# EAGLE board WiiMouseSchematicRev2 (EAGLE 5.07)
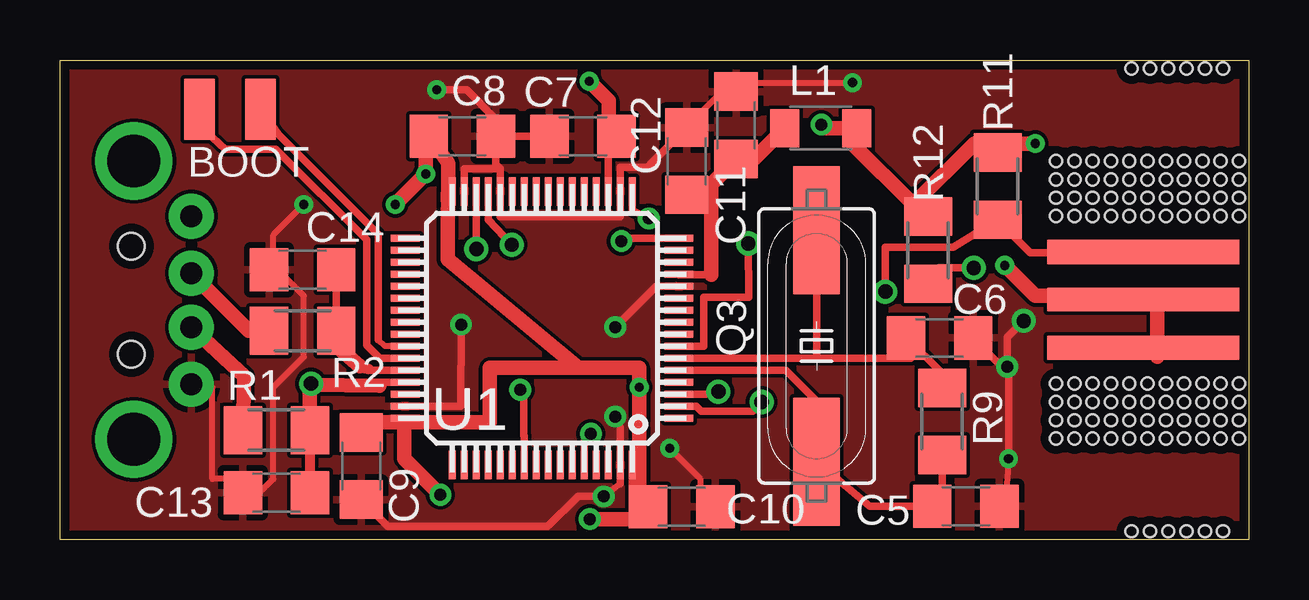
[diagram p0: board, top side]
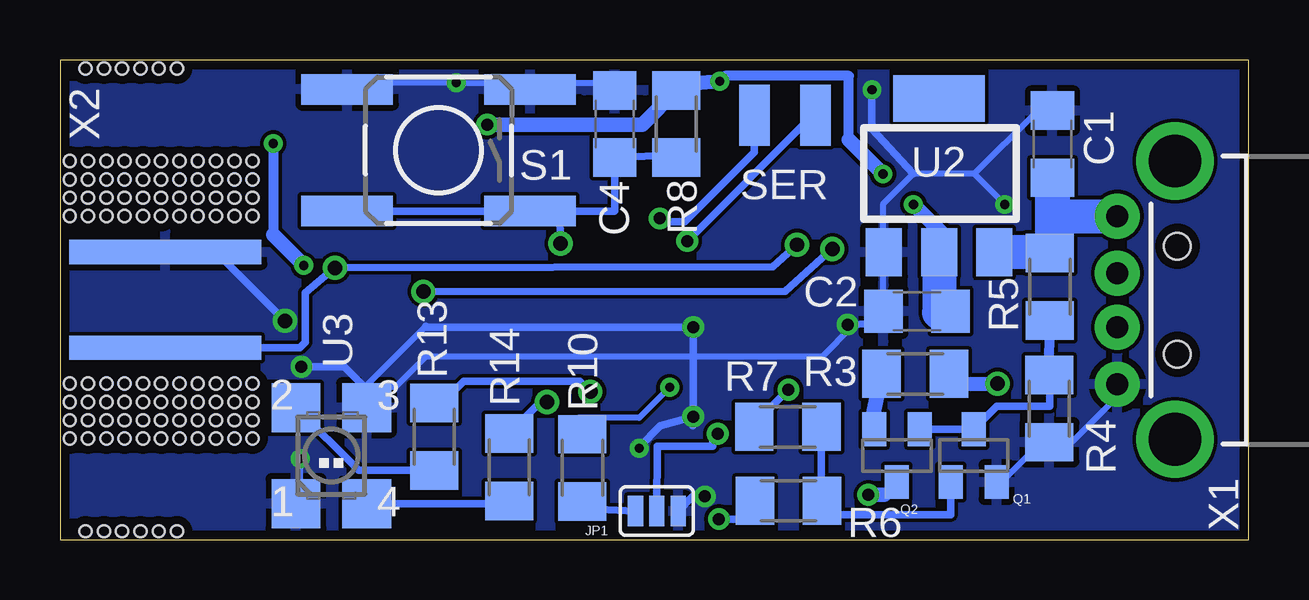
[diagram p1: board, bottom side, seen from below]

Size 49.53 x 19.99 mm. Coordinates in mm from the lower left corner, seen from the top.
Outline: 49.53,0 0,0 0,19.99 49.53,19.99 49.53,0
Copper layers (1*16): Top 0.0356mm / dielectric 1.5011mm / Bottom 0.0356mm
Design rules "typical_4pcb": minimum track width 10mil, minimum drill 15mil, track to track 6mil, track to pad 6mil, pad to pad 6mil, via to via 6mil, smd to smd 6mil, copper to edge 15mil, drill to drill 8mil, minimum pad ring 10mil, minimum via ring 8mil, stop-mask expansion 4mil, vias tented up to drill 0mil, thermal gap 10mil

## Footprints (pad centres in the part's own frame; a part is rotated, then mirrored left to right if it is on the bottom)
JUMPER-2-SMD = smd 1.27 x 2.54: P$1 -1.27,0; P$2 1.27,0
C1206 = smd 1.6 x 1.8: 1 -1.4,0; 2 1.4,0
SJ_3 = smd 0.635 x 1.27: 1 -0.889,0; 2 0,0; 3 0.889,0
L3216C = smd 1.2 x 1.6: 1 -1.5,0; 2 1.5,0
SOT23 = smd 1 x 1.4: 1 -0.95,-1.1; 2 0.95,-1.1; 3 0,1.1
HC49UP = smd 5.334 x 1.93: 1 -4.826,0; 2 4.826,0
M1206 = smd 1.6 x 2: 1 -1.4,0; 2 1.4,0
PUSH-BTN = smd 3.81 x 1.27: 1 -3.81,2.54; 2 3.81,2.54; 3 -3.81,-2.54; 4 3.81,-2.54
TQFP64 = smd 1.2 x 0.3: 1 -5.7,3.75; 2 -5.7,3.25; 3 -5.7,2.75; 4 -5.7,2.25; 5 -5.7,1.75; 6 -5.7,1.25; 7 -5.7,0.75; 8 -5.7,0.25; 9 -5.7,-0.25; 10 -5.7,-0.75; 11 -5.7,-1.25; 12 -5.7,-1.75; 13 -5.7,-2.25; 14 -5.7,-2.75; 15 -5.7,-3.25; 16 -5.7,-3.75; 33 5.7,-3.75; 34 5.7,-3.25; 35 5.7,-2.75; 36 5.7,-2.25; 37 5.7,-1.75; 38 5.7,-1.25; 39 5.7,-0.75; 40 5.7,-0.25; 41 5.7,0.25; 42 5.7,0.75; 43 5.7,1.25; 44 5.7,1.75; 45 5.7,2.25; 46 5.7,2.75; 47 5.7,3.25; 48 5.7,3.75 | smd 0.3 x 1.2: 17 -3.75,-5.7; 18 -3.25,-5.7; 19 -2.75,-5.7; 20 -2.25,-5.7; 21 -1.75,-5.7; 22 -1.25,-5.7; 23 -0.75,-5.7; 24 -0.25,-5.7; 25 0.25,-5.7; 26 0.75,-5.7; 27 1.25,-5.7; 28 1.75,-5.7; 29 2.25,-5.7; 30 2.75,-5.7; 31 3.25,-5.7; 32 3.75,-5.7; 49 3.75,5.7; 50 3.25,5.7; 51 2.75,5.7; 52 2.25,5.7; 53 1.75,5.7; 54 1.25,5.7; 55 0.75,5.7; 56 0.25,5.7; 57 -0.25,5.7; 58 -0.75,5.7; 59 -1.25,5.7; 60 -1.75,5.7; 61 -2.25,5.7; 62 -2.75,5.7; 63 -3.25,5.7; 64 -3.75,5.7
SOT-223 = smd 1.499 x 2.007: 1 -2.3,-3.235; 2 0,-3.235; 3 2.3,-3.235 | smd 3.81 x 1.93: 4 0,3.175
LED-PLCC-4 = smd 2.032 x 2.032: 1 -1.473,-2; 2 -1.473,2; 3 1.473,2; 4 1.473,-2
USB-A-H = drill 0.914 pad 1.88 round: D+ 2.4,1.127; D- 2.4,-1.127; GND 2.4,3.5; VBUS 2.4,-3.5 | drill 2.2 round: GND2 0,-5.8; GND3 0,5.8 | hole 1.1: -0.1,2.25; -0.1,-2.25
CONN-WII-MOUSE = smd 1.016 x 8.001: GND 11.989,-4.394; SCL 8.001,-4.394 | smd 0.991 x 8.001 bottom: REF_POS 10.008,-4.394 | smd 1.016 x 8.001 bottom: SDA 11.989,-4.394; VCC 8.001,-4.394 | hole 0.5: 5.74,-0.406; 6.502,-0.406; 0.356,-2.591; 0.356,-4.877; 0.356,-3.353; 0.356,-4.115; 4.978,-0.406; 4.216,-0.406; 5.74,-1.168; 6.502,-1.168; 4.978,-1.168; 4.216,-1.168; 5.74,-1.93; 6.502,-1.93; 4.978,-1.93; 4.216,-1.93; 5.74,-2.692; 6.502,-2.692; 4.978,-2.692; 4.216,-2.692; 5.74,-3.454; 6.502,-3.454; 4.978,-3.454; 4.216,-3.454; 5.74,-4.216; 6.502,-4.216; 4.978,-4.216; 4.216,-4.216; 5.74,-4.978; 6.502,-4.978; 4.978,-4.978; 4.216,-4.978; 5.74,-5.74; 6.502,-5.74; 4.978,-5.74; 4.216,-5.74; 5.74,-6.502; 6.502,-6.502; 4.978,-6.502; 4.216,-6.502; 5.74,-7.264; 6.502,-7.264; 4.978,-7.264; 4.216,-7.264; 5.74,-8.026; 6.502,-8.026; 4.978,-8.026; 4.216,-8.026; 15.011,-0.406; 15.773,-0.406; 14.249,-0.406; 13.487,-0.406; 15.011,-1.168; 15.773,-1.168; 14.249,-1.168; 13.487,-1.168; 15.011,-1.93; 15.773,-1.93; 14.249,-1.93; 13.487,-1.93; 15.011,-2.692; 15.773,-2.692; 14.249,-2.692; 13.487,-2.692; 15.011,-3.454; 15.773,-3.454; 14.249,-3.454; 13.487,-3.454; 15.011,-4.216; 15.773,-4.216; 14.249,-4.216; 13.487,-4.216; 15.011,-4.978; 15.773,-4.978; 14.249,-4.978; 13.487,-4.978; 15.011,-5.74; 15.773,-5.74; 14.249,-5.74; 13.487,-5.74; 15.011,-6.502; 15.773,-6.502; 14.249,-6.502; 13.487,-6.502; 15.011,-7.264; 15.773,-7.264; 14.249,-7.264; 13.487,-7.264; 15.011,-8.026; 15.773,-8.026; 14.249,-8.026; 13.487,-8.026; 19.634,-2.591; 19.634,-4.877; 19.634,-3.353; 19.634,-4.115; 0.356,-1.829; 0.356,-1.067; 19.634,-1.829; 19.634,-1.067

## Placement (x,y rotation side)
BOOT  JUMPER-2-SMD  [JUMPER-2-SMD]  7.09,17.93 0 top
C1  100nF  [C1206]  8.18,16.48 90 bottom
C2  10uF  [C1206]  13.82,9.53 180 bottom
C4  100nF  [C1206]  26.42,17.32 90 bottom
C5  18pF  [C1206]  37.74,1.4 0 top
C6  18pF  [C1206]  36.65,8.41 0 top
C7  100nF  [C1206]  21.79,16.81 180 top
C8  100nF  [C1206]  16.76,16.81 0 top
C9  100nF  [C1206]  12.55,3.07 270 top
C10  100nF  [C1206]  25.91,1.37 0 top
C11  10uF  [C1206]  28.17,17.27 90 top
C12  100nF  [C1206]  26.11,15.77 90 top
C13  47pF(NA)  [C1206]  9.02,1.96 180 top
C14  47pF(NA)  [C1206]  10.11,11.25 180 top
JP1  JUMPER-3SMD  [SJ_3]  24.66,1.19 180 bottom
L1  ferrite bead  [L3216C]  31.7,17.14 0 top
Q1  BC817  [SOT23]  11.46,3.51 0 bottom
Q2  BC817  [SOT23]  14.66,3.51 180 bottom
Q3  8MHz  [HC49UP]  31.52,8.08 270 top
R1  22  [M1206]  9.02,4.57 0 top
R2  22  [M1206]  10.11,8.71 0 top
R3  1.5k  [M1206]  13.89,6.91 180 bottom
R4  36k  [M1206]  8.31,5.46 90 bottom
R5  10k  [M1206]  8.28,10.54 90 bottom
R6  47k  [M1206]  19.18,1.63 180 bottom
R7  1k  [M1206]  19.2,4.7 180 bottom
R8  10k  [M1206]  23.85,17.32 90 bottom
R9  1M  [M1206]  36.75,4.93 270 top
R10  100k  [M1206]  27.76,3 270 bottom
R11  2.2k  [M1206]  39.07,14.73 90 top
R12  2.2k  [M1206]  36.17,12.06 90 top
R13  240  [M1206]  33.93,4.29 90 bottom
R14  240  [M1206]  30.81,3.02 90 bottom
S1  SWITCH-MOMENTARY  [PUSH-BTN]  33.76,16.23 180 bottom
SER  JUMPER-2-SMD  [JUMPER-2-SMD]  19.33,17.68 0 bottom
U1  STM32F10XRXT6  [TQFP64]  20.09,8.81 180 top
U2  [SOT-223]  12.9,15.21 0 bottom
U3  LED-PLLC-4  [LED-PLCC-4]  38.23,3.51 0 bottom
X1  USB-A-H  [USB-A-H]  3.07,9.98 180 bottom
X2  WII-NUNCHUCK  [CONN-WII-MOUSE]  49.53,0 90 bottom

## Library data of the parts
BOOT S1 SER U2 U3 X2 = parts_library
C1 C2 C4-C14 L1 = rcl
JP1 Q1 Q2 X1 = SparkFun
Q3 = crystal; OC_FARNELL: unknown; OC_NEWARK: unknown
R1-R14 = resistor
U1 = stm32

## Nets
+3V3: C2.1 C7.1 C8.1 C9.1 C10.1 L1.2 Q2.3 R6.2 R8.2 R10.1 R11.2 R12.2 U1.19 U1.32 U1.48 U1.64 U2.2 X2.REF_POS X2.VCC
+5V: C1.1 R5.2 U2.3 X1.VBUS
BOOT_0: JP1.2 U1.60
BOOT_RX: BOOT.P$1 U1.43
BOOT_TX: BOOT.P$2 U1.42
GND: C1.2 C2.2 C4.2 C5.2 C6.2 C7.2 C8.2 C9.2 C10.2 C11.2 C12.2 C13.2 C14.2 JP1.1 Q1.2 R4.1 S1.3 S1.4 U1.12 U1.18 U1.28 U1.31 U1.47 U1.63 U2.1 U3.1 U3.3 X1.GND X2.GND
LED_ERROR: R13.2 U1.3
LED_LINK: R14.2 U1.2
N$1: R2.1 X1.D-
N$2: R1.1 X1.D+
N$3: Q2.2 R3.2
N$4: Q1.3 Q2.1 R4.2 R5.1
N$5: C5.1 Q3.2 R9.2 U1.5
N$6: Q1.1 R6.1 R7.1
N$7: C6.1 Q3.1 R9.1 U1.6
N$10: R13.1 U3.2
N$11: JP1.3 R10.2
N$12: R14.1 U3.4
NUNCHUCK_SCL: R12.1 U1.29 X2.SCL
NUNCHUCK_SDA: R11.1 U1.30 X2.SDA
RESET: C4.1 R8.1 S1.1 S1.2 U1.7
SER_RX: SER.P$1 U1.17
SER_TX: SER.P$2 U1.16
USB_D+: C13.1 R1.2 R3.1 U1.45
USB_D-: C14.1 R2.2 U1.44
USB_ENABLE: R7.2 U1.55
VBAT: U1.1
VDDA: C11.1 C12.1 L1.1 U1.13

## Tracks (layer width: path | path; a pad name or v marks a point on that pad's centre or on a via)
+3V3  (via drill 0.38, 0.5)
  Top 0.254: 24.13,1.27 C10.1 | 22.86,16.51 C7.1 | C8.1 15.24,16.51 | L1.2 33.02,16.51 | 38.1,16.51 R11.2 39.37,16.51 | 35.56,13.97 R12.2 | 44.45,10.16 X2.REF_POS 45.72,10.16 | 45.72,7.62 X2.VCC
  Top 0.305: C9.1 12.53,5.04 12.96,4.89 U1.48 14.39,4.41 14.35,4.83 | U1.19 22.84,16.46 C7.1 | U1.64 23.84,2.04 C10.1 arc-90 24,0.86 | v31.73,17.3 31.88,17.14 | 14.35,3.38 14.39,3.34 | 16.15,13.76 16.18,13.74 | 16.15,14.43 16.22,14.51 U1.32 16.34,14.6 16.18,14.63 | 16.18,15.68 16.16,15.74
  Top 0.61: 16.16,15.74 C8.1 | 24.13,1.27 v24.13,6.35 24.13,7.16 21.59,7.16 | 15.24,16.51 v15.24,15.24 v13.97,13.97 | 33.02,16.51 35.56,13.97 38.1,16.51 | 39.37,16.51 v40.64,16.51 | v39.37,11.43 40.64,10.16 44.45,10.16 | 45.72,10.16 45.72,7.62 | 24,0.86 v22.07,0.86 | 14.39,3.34 v15.85,1.88 | 31.88,17.14 L1.2 | 22.86,16.51 22.86,18.29 v22.05,19.1 | 16.15,13.76 16.15,11.68 21.59,7.16 | 21.59,7.16 17.91,7.16 17.91,4.89 12.96,4.89 | 14.35,4.83 14.35,3.38 | 16.18,13.74 16.15,14.43 | 16.18,14.63 16.18,15.68
  Bottom 0.254: v24.13,6.35 25.4,5.08 27.94,5.08 R10.1 | 22.86,19.05 R8.2 | 12.7,12.7 U2.2
  Bottom 0.305: R6.2 21.34,0.86 v22.07,0.86 | 15.18,1.88 Q2.3 | 21.82,19.33 v22.05,19.1
  Bottom 0.406: v40.64,16.51 40.64,12.7 | 16.66,16.66 16.66,19.33 21.82,19.33
  Bottom 0.61: v22.05,19.1 22.86,19.05 | v13.97,13.97 12.7,12.7 | 40.64,12.7 v39.37,11.43 | v15.85,1.88 15.18,1.88 | R8.2 25.28,17.3 v31.73,17.3 | v15.24,15.24 16.66,16.66
  Bottom 0.813: 12.9,9.47 C2.1
  Bottom 1.422: U2.2 12.9,9.47
+5V
  Bottom 0.813: C1.1 8.18,14.4
  Bottom 1.422: X1.VBUS 8.15,13.48 C1.1 8.18,11.98 8.28,11.98 | 8.28,11.98 U2.3 | R5.2 8.28,11.98
BOOT_0  (via drill 0.5)
  Top 0.305: U1.60 21.84,4.11 v22.12,4.42
  Bottom 0.305: JP1.2 24.64,3.89 22.33,3.89 22.33,4.45 v22.12,4.42
BOOT_RX
  Top 0.305: U1.43 13.31,7.56 12.78,8.1 12.78,12.5 8.99,16.28 6.88,16.28 5.84,17.22 BOOT.P$1
BOOT_TX
  Top 0.254: U1.42 13.55,8.06 13.26,8.33
  Top 0.305: 13.26,8.33 13.26,12.72 9.09,16.89 BOOT.P$2
GND  (via drill 0.38, 0.5, 0.6)
  Top 0.254: X1.GND 6.35,6.35 6.35,2.54 7.62,2.54 C13.2 7.62,1.27 8.89,2.54 8.89,6.35 10.16,7.62 10.16,10.16 8.89,11.43 | C8.2 17.78,16.51 | v39.52,3.38 39.37,1.27 C5.2 | C9.2 12.7,1.27 | v25.4,3.81 26.67,2.54 26.67,1.27 C10.2 | 8.89,11.43 8.89,12.7 v10.16,13.97 | 8.89,11.43 C14.2 | 27.94,19.05 26.67,17.78 C12.2 | 27.94,19.05 v33.02,19.05 | 27.94,19.05 C11.2 | 23.34,2.34 v22.66,1.8
  Top 0.305: C8.2 C7.2 | U1.31 16.84,15.47 18.34,15.47 | 18.34,15.47 U1.28 18.34,13.46 23.34,13.46 U1.18 23.34,15.52 24.59,15.52 24.59,15.65 C12.2 | v40.16,9.12 39.47,8.43 v39.47,7.21 | C6.2 39.25,7.21 v39.47,7.21 | v39.47,7.21 39.52,7.21 v39.52,3.38 | C9.2 13.66,0.56 20.32,0.56 21.59,1.8 v22.66,1.8 | 23.34,2.34 U1.63 23.34,4.67 v23.14,5.13 | U1.47 16.69,5.56 v16.71,8.97 | 18.34,15.47 18.16,15.64 C8.2 | v15.7,18.75 16.94,18.75 18.14,17.55 18.14,16.84 C8.2 | U1.12 24.84,10.56 v23.14,8.87
  Bottom 0.254: Q1.2 10.16,2.54 8.89,3.81 R4.1 7.62,3.81 5.08,6.35 X1.GND | 11.43,15.24 8.89,17.78 C1.2 | 11.43,15.24 13.97,15.24 15.24,13.97 15.24,12.7 U2.1 15.24,11.43 15.24,10.16 C2.2 | v39.52,3.38 39.57,0.91 U3.1 | 36.83,6.35 34.29,8.89 | v10.16,13.97 11.43,15.24 | C4.2 26.67,19.05 29.21,19.05 S1.3 30.48,19.05 v33.02,19.05 36.83,19.05 S1.4 | 36.83,6.35 35.56,6.35 34.29,7.62 17.78,7.62 16.51,8.89 v16.71,8.97 | 36.83,6.35 U3.3
  Bottom 0.305: v40.16,9.12 43.03,11.99 X2.GND | 36.83,6.35 37.69,7.21 v39.47,7.21 | v22.66,1.8 23.16,1.8 JP1.1 | v25.4,3.81 25.4,3.86 24.51,4.75 v23.14,5.13 | 23.16,4.85 23.16,4.75 v23.14,5.13 | v15.7,18.75 15.7,17.12 13.97,15.24 | C2.2 arc90 15.75,8.99 v16.71,8.97 arc90 16.64,8.87 | v23.14,5.13 arc-90 23.16,4.85 | 34.29,8.89 34.27,8.87 v23.14,8.87 v23.14,5.13 | 23.16,4.85 23.14,4.88 v23.14,5.13
  pour Bottom: 0.25,19.74 49.28,19.74 49.28,0.25 0.25,0.25
  pour Top: 0.25,19.74 49.28,19.74 49.28,0.25 0.25,0.25
LED_ERROR  (via drill 0.6)
  Top 0.305: U1.3 27.32,6.06 v27.43,6.17
  Bottom 0.305: v27.43,6.17 27.86,6.6 32.72,6.6 33.63,5.69 R13.2
LED_LINK  (via drill 0.6)
  Top 0.305: U1.2 26.52,5.56 26.72,5.36 28.85,5.36 v29.23,5.74
  Bottom 0.305: v29.23,5.74 29.49,5.74 R14.2
N$1
  Top 0.406: R2.1 7.87,8.71
  Top 0.61: 7.87,8.71 X1.D-
N$2
  Top 0.61: X1.D+ 7.67,6.81 R1.1
N$3
  Bottom 0.305: Q2.2 15.75,4.75
  Bottom 0.61: 15.75,4.75 R3.2
N$4
  Bottom 0.305: Q2.1 Q1.3 10.5,5.56 8.28,5.56 R4.2
  Bottom 0.406: R4.2 R5.1
N$5
  Top 0.305: R9.2 36.75,1.81 C5.1 33.73,1.4 Q3.2 32.21,3.02 32.21,5.11 30.25,7.06 U1.5
N$6
  Bottom 0.305: Q1.1 12.4,1.04 17.8,1.04 17.8,1.63 | 17.8,1.63 R7.1 | 17.8,1.63 R6.1
N$7
  Top 0.305: U1.6 31.52,7.56 | 31.52,7.56 35.45,7.56 C6.1 | R9.1 36.75,6.93 C6.1 | C6.1 34.95,8.46 | 31.52,7.56 Q3.1
N$10
  Bottom 0.305: R13.1 37.09,2.89 U3.2
N$11
  Bottom 0.305: R10.2 27.46,1.29 JP1.3
N$12
  Bottom 0.305: R14.1 30.93,1.5 U3.4
NUNCHUCK_SCL  (via drill 0.6)
  Top 0.305: R12.1 36.6,11.33 v38.08,11.33 | v18.82,12.29 17.84,13.32 U1.29
  Bottom 0.305: v18.82,12.29 19.84,11.38 v38.08,11.33 39.32,10.29 39.32,8.23 39.55,8 X2.SCL
NUNCHUCK_SDA  (via drill 0.6)
  Top 0.305: X2.SDA 45.11,11.96 40.44,11.96 R11.1 37.21,12.19 34.39,12.19 v34.39,10.34 | v17.35,12.12 17.34,13.61 U1.30
  Bottom 0.305: v34.39,10.34 19.3,10.36 v17.35,12.12
RESET  (via drill 0.6)
  Top 0.305: U1.7 26.82,8.06 26.82,10.11 28.7,10.11 v28.68,12.34
  Bottom 0.305: v28.68,12.34 28.7,13.69 | 28.7,13.69 S1.1 S1.2 | R8.1 23.88,16.05 C4.1 26.42,13.72 26.44,13.69 28.7,13.69
SER_RX  (via drill 0.5)
  Top 0.305: v24.54,13.39 23.84,13.72 U1.17
  Bottom 0.305: SER.P$1 20.6,16.15 23.5,13.26 24.41,13.26 v24.54,13.39
SER_TX  (via drill 0.5)
  Top 0.305: U1.16 23.51,12.56 arc90 v23.39,12.45
  Bottom 0.305: SER.P$2 18.16,17.68 v23.39,12.45
USB_D+  (via drill 0.6)
  Top 0.305: 10.4,6.49 10.59,6.54 v10.46,6.5 arc90 10.41,6.45 | U1.45 13.31,6.56 13.31,6.43
  Top 0.406: C13.1 R1.2
  Top 0.61: R1.2 10.4,6.49 | 10.41,6.45 13.31,6.43
  Bottom 0.305: 12.47,6.48 R3.1
  Bottom 0.61: v10.46,6.5 12.47,6.48
USB_D-
  Top 0.305: C14.1 R2.2 11.46,8.13 | U1.44 12.85,7.06 12.88,7.11 | 12.5,7.24 12.7,7.14
  Top 0.406: 12.7,7.14 12.88,7.11
  Top 0.61: 12.5,7.24 11.46,8.13
USB_ENABLE  (via drill 0.5)
  Top 0.305: U1.55 19.34,4.34 19.33,4.34 19.33,6.1 v19.18,6.25
  Bottom 0.305: R7.2 20.6,4.82 v19.18,6.25
VDDA
  Top 0.305: U1.13 25.79,11.05 27.13,11.05 | 26.85,14.45 27.13,14.81 26.44,14.05 C12.1 26.75,14.4 | C11.1 28.93,15.87
  Top 0.61: 27.13,11.05 27.13,14.81 | 26.75,14.4 C11.1 | 28.93,15.87 L1.1

## Text on the board
tDocu: RX | TX | STM32 | F10X
bDocu: RX | TX | This Side Up | BF | BS